# Altium PCB Copy of PCB1.PcbDoc
Units mil, origin at the board's own origin, x right, y up, seen from the top; angles counter-clockwise.
Board outline 6000 x 4000 mil, 2 copper layers (Top Layer, Bottom Layer); 109 components, 164 nets, 445 pads, 187 vias.
Unrouted connection lines stored in the file: 77.
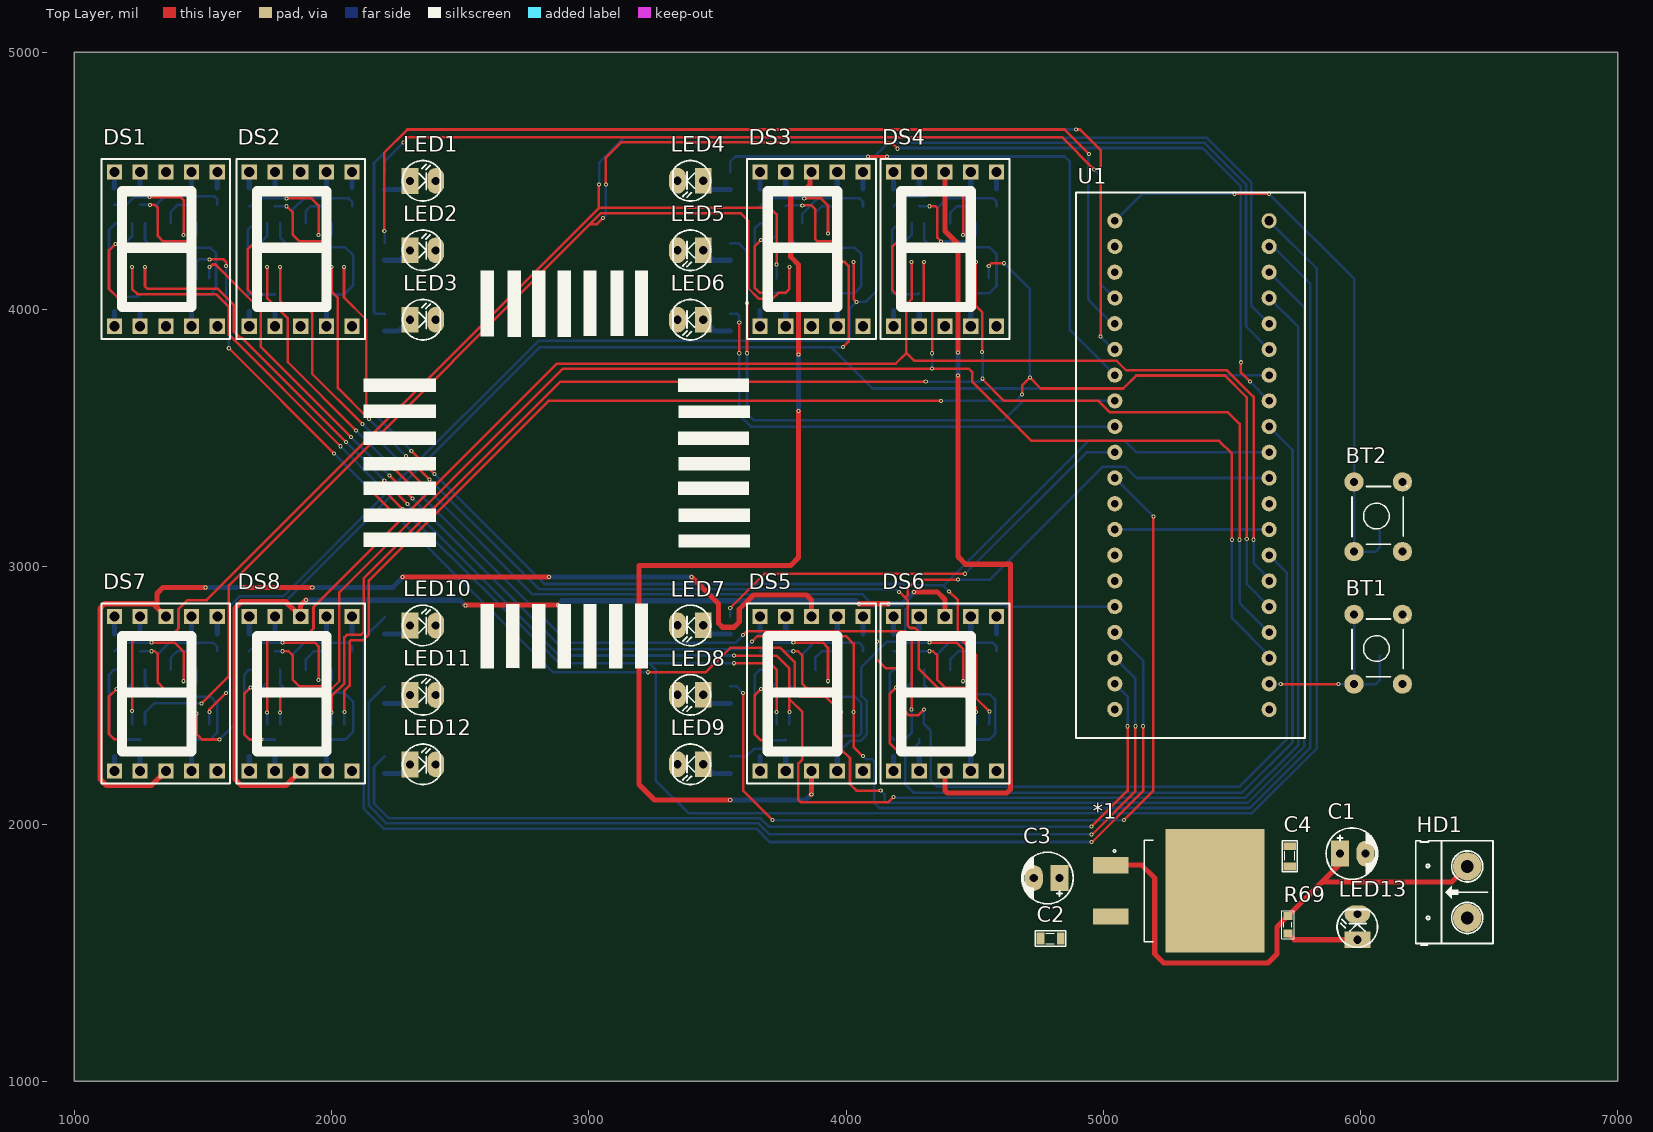
[diagram p0: Top Layer view]
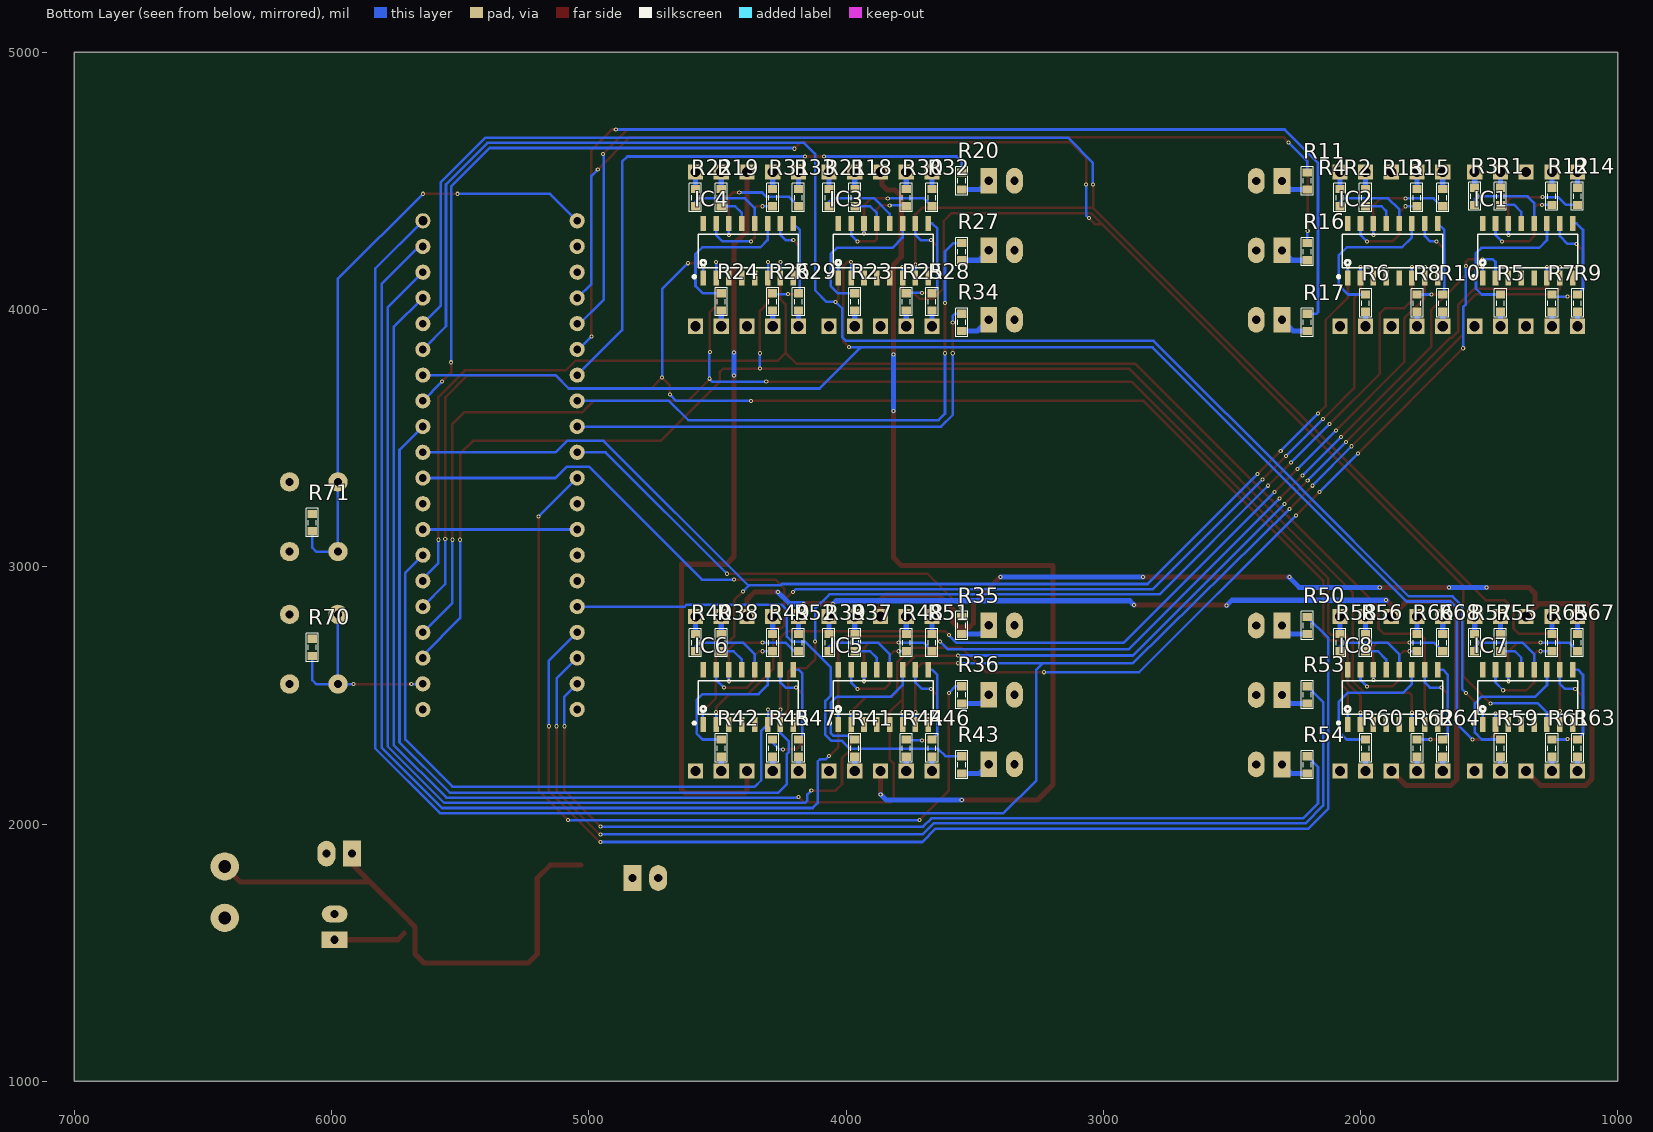
[diagram p1: Bottom Layer view, seen from below]

## Layer stack, top to bottom
Top Solder: solder mask 0.4, Solder Resist, Dk 3.5
Top Layer: signal copper 1.4
Dielectric 1: dielectric 12.6, FR-4, Dk 4.8
Bottom Layer: signal copper 1.4
Bottom Solder: solder mask 0.4, Solder Resist, Dk 3.5

## Board outline
1000,1000 7000,1000 7000,5000 1000,5000

## Design rules (kind name [scope] priority, off if disabled: settings)
Clearance [All] p1: gap=10 ignorepadtopadclearanceinfootprint=TRUE
PlaneClearance [All] p1: clearance=12
PlaneConnect [All] p1: planeconnectstyle=Relief reliefexpansion=20 reliefentries=4 reliefconductorwidth=15 reliefairgap=8
PolygonConnect [All] p1: connectstyle=Relief reliefconductorwidth=15 reliefentries=4 polygonreliefangle="45 Angle" airgapwidth=8
RoutingVias [All] p1: holewidth=7.87 width=15.75 viastyle="Through Hole" minholewidth=7.87 minwidth=15.75 maxholewidth=7.87 maxwidth=15.75
SolderMaskExpansion [All] p1: expansion=4
Width [All] p1: maxlimit=40 minlimit=8 preferedwidth=10
28 further rules are at their usual default settings.

## Classes and differential pairs
component class Sheet1: *1 BT1 BT2 C1 C2 C3 C4 DS1 DS2 DS3 DS4 DS5 DS6 DS7 DS8 HD1 IC1 LED1 LED2 LED3 LED4 LED5 LED6 LED7 LED8 LED9 LED10 LED11 LED12 LED13 R1 R2 R3 R4 R5 R6 R7 R8 R9 R10 R11 R12 R13 R14 R15 R16 R17 R18 R19 R20 R21 R22 R23 R24 R25 R26 R27 R28 R29 R30 R31 R32 R33 R34 R35 R36 R37 R38 R39 R40 R41 R42 R43 R44 R45 R46 R47 R48 R49 R50 R51 R52 R53 R54 R55 R56 R57 R58 R59 R60 R61 R62 R63 R64 R65 R66 R67 R68 R69 R70 R71 U1

## Components (designator, comment, footprint, x,y, rotation, side; value= is the part's Value field where it differs from the comment)
*1 "7805to263" 7805 5293.78,1740 r0 top
BT1 "BTv" SW4 5967,2557 r90 top
BT2 "BTDX" SW4 5967,3072 r90 top
C1 "CAP hoa" CP1/2 5920,1885 r0 top
C2 "104" SM-CAP-0805 4750,1555 r0 top value=0,1uF/300V
C3 "CAP hoa" CP1/2 4830,1790 r180 top
C4 "104" SM-CAP-0805 5725,1920 r270 top value=0,1uF/300V
DS1 "7SEG-A" LED7SEG 1355,4235 r0 top locked
DS2 "7SEG-A" LED7SEG 1879,4235 r0 top locked
DS3 "7SEG-A" LED7SEG 3865,4235 r0 top locked
DS4 "7SEG-A" LED7SEG 4384,4235 r0 top locked
DS5 "7SEG-A" LED7SEG 3865,2506.54 r0 top locked
DS6 "7SEG-A" LED7SEG 4384,2506.54 r0 top locked
DS7 "7SEG-A" LED7SEG 1355,2506.54 r0 top locked
DS8 "7SEG-A" LED7SEG 1879,2506.54 r0 top locked
HD1 "Header 2" HED2 6415,1635 r90 top
IC1 "7447" ic74ls47 975,4122.4 r180 bottom locked value="7447 , 74247"
IC2 "7447" ic74ls47 1500,4122.4 r180 bottom locked value="7447 , 74247"
IC3 "7447" ic74ls47 3480,4122.4 r180 bottom locked value="7447 , 74247"
IC4 "7447" ic74ls47 4005,4122.4 r180 bottom locked value="7447 , 74247"
IC5 "7447" ic74ls47 3480,2387.4 r180 bottom locked value="7447 , 74247"
IC6 "7447" ic74ls47 4005,2387.4 r180 bottom locked value="7447 , 74247"
IC7 "7447" ic74ls47 975,2387.4 r180 bottom locked value="7447 , 74247"
IC8 "7447" ic74ls47 1500,2387.4 r180 bottom locked value="7447 , 74247"
LED1 "LED" LED-3 2305,4500 r0 top value="LED 3 ly Single Colour"
LED2 "LED" LED-3 2305,4230 r0 top value="LED 3 ly Single Colour"
LED3 "LED" LED-3 2305,3960 r0 top value="LED 3 ly Single Colour"
LED4 "LED" LED-3 3445,4500.7 r180 top value="LED 3 ly Single Colour"
LED5 "LED" LED-3 3445,4230.7 r180 top value="LED 3 ly Single Colour"
LED6 "LED" LED-3 3445,3960.7 r180 top value="LED 3 ly Single Colour"
LED7 "LED" LED-3 3445,2772.23 r180 top value="LED 3 ly Single Colour"
LED8 "LED" LED-3 3445,2502.23 r180 top value="LED 3 ly Single Colour"
LED9 "LED" LED-3 3445,2232.23 r180 top value="LED 3 ly Single Colour"
LED10 "LED" LED-3 2305,2771.54 r0 top value="LED 3 ly Single Colour"
LED11 "LED" LED-3 2305,2501.54 r0 top value="LED 3 ly Single Colour"
LED12 "LED" LED-3 2305,2231.54 r0 top value="LED 3 ly Single Colour"
LED13 "LED" LED-3 5988.19,1550 r90 top value="LED 3 ly Single Colour"
R1 "10k" "Resistor SMD0603" 1456,4440 r270 bottom
R2 "10k" "Resistor SMD0603" 1980,4435 r270 bottom
R3 "10k" "Resistor SMD0603" 1556,4440 r270 bottom
R4 "10k" "Resistor SMD0603" 2080,4435 r270 bottom
R5 "10k" "Resistor SMD0603" 1456,4025 r90 bottom
R6 "10k" "Resistor SMD0603" 1980,4025 r90 bottom
R7 "10k" "Resistor SMD0603" 1256,4025 r90 bottom
R8 "10k" "Resistor SMD0603" 1780,4025 r90 bottom
R9 "10k" "Resistor SMD0603" 1156,4025 r90 bottom
R10 "10k" "Resistor SMD0603" 1680,4025 r90 bottom
R11 "10k" "Resistor SMD0603" 2207,4500 r90 bottom
R12 "10k" "Resistor SMD0603" 1256,4440 r270 bottom
R13 "10k" "Resistor SMD0603" 1780,4435 r270 bottom
R14 "10k" "Resistor SMD0603" 1156,4440 r270 bottom
R15 "10k" "Resistor SMD0603" 1680,4435 r270 bottom
R16 "10k" "Resistor SMD0603" 2207,4225 r90 bottom
R17 "10k" "Resistor SMD0603" 2207,3950 r90 bottom
R18 "10k" "Resistor SMD0603" 3965,4435 r270 bottom
R19 "10k" "Resistor SMD0603" 4485,4435 r270 bottom
R20 "10k" "Resistor SMD0603" 3550,4500 r90 bottom
R21 "10k" "Resistor SMD0603" 4066,4435 r270 bottom
R22 "10k" "Resistor SMD0603" 4585,4435 r270 bottom
R23 "10k" "Resistor SMD0603" 3966,4030 r90 bottom
R24 "10k" "Resistor SMD0603" 4485,4030 r90 bottom
R25 "10k" "Resistor SMD0603" 3766,4030 r90 bottom
R26 "10k" "Resistor SMD0603" 4285,4030 r90 bottom
R27 "10k" "Resistor SMD0603" 3550,4225 r90 bottom
R28 "10k" "Resistor SMD0603" 3666,4030 r90 bottom
R29 "10k" "Resistor SMD0603" 4185,4030 r90 bottom
R30 "10k" "Resistor SMD0603" 3766,4435 r270 bottom
R31 "10k" "Resistor SMD0603" 4285,4435 r270 bottom
R32 "10k" "Resistor SMD0603" 3666,4435 r270 bottom
R33 "10k" "Resistor SMD0603" 4185,4435 r270 bottom
R34 "10k" "Resistor SMD0603" 3550,3950 r90 bottom
R35 "10k" "Resistor SMD0603" 3550,2771.54 r90 bottom
R36 "10k" "Resistor SMD0603" 3550,2502.23 r90 bottom
R37 "10k" "Resistor SMD0603" 3965,2705 r270 bottom
R38 "10k" "Resistor SMD0603" 4485,2705 r270 bottom
R39 "10k" "Resistor SMD0603" 4066,2705 r270 bottom
R40 "10k" "Resistor SMD0603" 4585,2705 r270 bottom
R41 "10k" "Resistor SMD0603" 3966,2295 r90 bottom
R42 "10k" "Resistor SMD0603" 4485,2295 r90 bottom
R43 "10k" "Resistor SMD0603" 3550,2230 r90 bottom
R44 "10k" "Resistor SMD0603" 3766,2295 r90 bottom
R45 "10k" "Resistor SMD0603" 4285,2295 r90 bottom
R46 "10k" "Resistor SMD0603" 3666,2295 r90 bottom
R47 "10k" "Resistor SMD0603" 4185,2295 r90 bottom
R48 "10k" "Resistor SMD0603" 3765,2705 r270 bottom
R49 "10k" "Resistor SMD0603" 4285,2705 r270 bottom
R50 "10k" "Resistor SMD0603" 2207,2771.54 r90 bottom
R51 "10k" "Resistor SMD0603" 3666,2705 r270 bottom
R52 "10k" "Resistor SMD0603" 4185,2705 r270 bottom
R53 "10k" "Resistor SMD0603" 2207,2502.23 r90 bottom
R54 "10k" "Resistor SMD0603" 2207,2230 r90 bottom
R55 "10k" "Resistor SMD0603" 1456,2705 r270 bottom
R56 "10k" "Resistor SMD0603" 1980,2705 r270 bottom
R57 "10k" "Resistor SMD0603" 1556,2705 r270 bottom
R58 "10k" "Resistor SMD0603" 2080,2705 r270 bottom
R59 "10k" "Resistor SMD0603" 1456,2295 r90 bottom
R60 "10k" "Resistor SMD0603" 1980,2295 r90 bottom
R61 "10k" "Resistor SMD0603" 1256,2295 r90 bottom
R62 "10k" "Resistor SMD0603" 1780,2295 r90 bottom
R63 "10k" "Resistor SMD0603" 1156,2295 r90 bottom
R64 "10k" "Resistor SMD0603" 1680,2295 r90 bottom
R65 "10k" "Resistor SMD0603" 1256,2705 r270 bottom
R66 "10k" "Resistor SMD0603" 1780,2705 r270 bottom
R67 "10k" "Resistor SMD0603" 1156,2705 r270 bottom
R68 "10k" "Resistor SMD0603" 1680,2705 r270 bottom
R69 "10k" "Resistor SMD0603" 5717.67,1608.54 r90 top
R70 "10k" "Resistor SMD0603" 6075,2686.54 r90 bottom
R71 "10k" "Resistor SMD0603" 6075,3171.54 r90 bottom
U1 "STM32F103CT8" STM32F103CT6 5045,4345 r0 top locked

## Footprints (in the part's own frame and the unit in brackets; to place one, negate y for a bottom-side part, rotate by r counter-clockwise, add the part's x,y. Pads: shape width x height; smd on the part's side, far side on the other; paste and mask are expansions set on the pad)
7805 [mm]
  rect 3.5x1.6 smd: 1(-6.7,2.54) 3(-6.7,-2.54)
  rect 9.75x12.2 smd paste-7: 2(3.575,0)
  silkscreen extent -6.48,-5 -2.51,5, body extent -7,-4.91 7.58,4.91, height 4.22
CP1/2 [mil]
  rect 70x100 hole 32: 1(0,0)
  oval 70x100 hole 32: 2(100,0)
  silkscreen extent -53,-100 147,100, body extent -54,-99 144,100, height 296
HED2 [mil] "Header 2, 2 pin, hight 300mil, Pin to Pin 200, Colour Green"
  round 110 hole 50: 1(0,0) 2(200,0)
  silkscreen extent -106,-100 300,200, body extent -92,-90 302,205, height 394
ic74ls47 [mm]
  rect 0.55x1.5 smd: 1(-13.97,0) 2(-12.7,0) 3(-11.43,0) 4(-10.16,0) 5(-8.89,0) 6(-7.62,0) 7(-6.35,0) 8(-5.08,0) 9(-5.08,5.4) 10(-6.35,5.4) 11(-7.62,5.4) 12(-8.89,5.4) 13(-10.16,5.4) 14(-11.43,5.4) 15(-12.7,5.4) 16(-13.97,5.4)
  silkscreen extent -14.99,0 -4.57,4.32, body extent -14.48,-0.36 -4.57,5.84, height 1.7
LED7SEG [mm] "LED7SEG"
  round 1.524 on Top Overlay: 0(4.724,-5.334)
  rect 1.5x1.5 hole 1: 1(-5.055,-7.62) 2(-2.515,-7.62) 3(0.025,-7.62) 4(2.565,-7.62) 5(5.105,-7.62) 6(5.105,7.62) 7(2.565,7.62) 8(0.025,7.62) 9(-2.515,7.62) 10(-5.055,7.62)
  silkscreen extent -6.32,-8.89 6.38,8.89, body extent -6.35,-9.52 6.35,9.53, height 8.03
LED-3 [mil] "LED 2 PIN, 3ly Only colour"
  rect 65x100 hole 32: 1(0,0)
  oval 65x100 hole 32: 2(100,0)
  silkscreen extent -29,-78 118,79, body extent -29,-75 109,75, height 256
"Resistor SMD0603" [mm]
  rect 0.8x0.9 smd: 1(-0.85,0) 2(0.85,0)
  silkscreen extent -1.4,-0.61 1.4,0.58, body extent -0.77,-0.45 0.78,0.4, height 0.49
SM-CAP-0805 [mil]
  rect 30x47.24 smd: 1(6,0) 2(85,0)
  silkscreen extent -15,-30 105,30, body extent 6,-25 84,25, height 31
STM32F103CT6 [mm] "STM32F103CT6"
  round 1.5 hole 0.762: 1(0,0) 2(0,-2.54) 3(0,-5.08) 4(0,-7.62) 5(0,-10.16) 6(0,-12.7) 7(0,-15.24) 8(0,-17.78) 9(0,-20.32) 10(0,-22.86) 11(0,-25.4) 12(0,-27.94) 13(0,-30.48) 14(0,-33.02) 15(0,-35.56) 16(0,-38.1) 17(0,-40.64) 18(0,-43.18) 19(0,-45.72) 20(0,-48.26) 22(15.24,-2.54) 23(15.24,-5.08) 24(15.24,-7.62) 25(15.24,-10.16) 26(15.24,-12.7) 27(15.24,-15.24) 28(15.24,-17.78) 29(15.24,-20.32) 30(15.24,-22.86) 31(15.24,-25.4) 32(15.24,-27.94) 33(15.24,-30.48) 34(15.24,-33.02) 35(15.24,-35.56) 36(15.24,-38.1) 37(15.24,-40.64) 38(15.24,-43.18) 39(15.24,-45.72) 40(15.24,-48.26)
  round 1.5 hole 0.9: 21(15.24,0)
  silkscreen extent -3.81,-51.05 18.8,2.79, body extent -3.61,-55.78 18.89,2.86, height 11.01
SW4 [mil] "SW button 4pin, 250 x250 mil"
  round 75 hole 31: 1(-13,-8) 1(258,-8) 2(-13,-196) 2(258,-196)
  silkscreen extent 15,-215 240,0, body extent -31,-225 281,19, height 276

## Part data
BT1 BT2: library part BUTTON
C1 C3: "Cap"
C2 C4: library part "CAP SMD", Designed by=VanDungEvn
DS1 DS2 DS3 DS4 DS5 DS6 DS7 DS8: library part "LED 7SEG-A", "14.2 mm General Purpose Blue 7-Segment Display: CA, RH DP, Gray Surface", Colour=Blue, PackageDocument=24-Sep-2002, ComponentLink1Description="Manufacturer Link", ComponentLink1URL=http://www.agilent.com/, DatasheetDocument=24-Sep-2002, LatestRevisionDate=17-Dec-2003, LatestRevisionNote="Schematic revised, PCB Footprint replaced.", MinimumIntensity="2020 ucd", Note="IF = 10 mA", PackageReference=H, Published=8-Jun-2000, Publisher="Altium Limited"
HD1: "Header 2 (Green)"
IC1 IC2 IC3 IC4 IC5 IC6 IC7 IC8: "BCD to 7-Segment Decoder/Driver"
LED1 LED2 LED3 LED4 LED5 LED6 LED7 LED8 LED9 LED10 LED11 LED12 LED13: "LED Single colour Green and Red"
R1 R2 R3 R4 R5 R6 R7 R8 R9 R10 R11 R12 R13 R14 R15 R16 R17 R18 R19 R20 R21 R22 R23 R24 R25 R26 R27 R28 R29 R30 R31 R32 R33 R34 R35 R36 R37 R38 R39 R40 R41 R42 R43 R44 R45 R46 R47 R48 R49 R50 R51 R52 R53 R54 R55 R56 R57 R58 R59 R60 R61 R62 R63 R64 R65 R66 R67 R68 R69 R70 R71: library part "Res SMD", "Res"

## Via types
v1: diameter 15.75, hole 7.87, Top Layer to Bottom Layer, 187 vias

## Nets (pads, with @x,y where several pads share a name; then routed paths per layer and width w, separated by ;. In a path a pad name is that pad's centre, name@x,y a point inside that pad or via, vN(x,y) a via of type N, cw(c..) or ccw(c..) an arc to the next point about the centre after c; other vN are vias at no path point)
5v: *1.3 C3.1 C4.2 R70.2 R71.2 U1.12 U1.15
A0: R11.2 U1.4 | length 3425
  Top Layer w10: v1(2280,4650) 2300,4670 4184.35,4670 4840,4670 v1(4965,4545)
  Bottom Layer w10: R11.2 2207,4577 v1(2280,4650) ; v1(4965,4545) 4990,4520 4990,4100 U1.4
A1: R16.2 U1.5 | length 3878.7
  Top Layer w10: v1(2205,4305) 2205,4610 2295,4700 4850,4700 v1(4945,4605)
  Bottom Layer w10: v1(2205,4305) 2207,4303 R16.2 ; v1(4945,4605) 4942.13,4602.13 4942.13,4037.87 5035,3945 U1.5
A2: R17.2 U1.6 | length 4337.4
  Top Layer w10: v1(4895,4700) 4910,4700 4990,4620 v1(4990,3895)
  Bottom Layer w10: R17.2 2171.54,3983.46 2165,3990 2165,4570 2295,4700 v1(4895,4700) ; v1(4990,3895) 5040,3845 U1.6
A3: R20.2 U1.7 | length 2280.6
  Top Layer w10: v1(4085,4595) v1(4160,4595)
  Bottom Layer w10: R20.2 3550,4575 3570,4595 v1(4085,4595) ; v1(4160,4595) 4850,4595 4870,4575 4870,3920 U1.7
A4: R27.2 U1.8 | length 2180.3
  Top Layer w10: v1(3615,3830) v1(3615,4025)
  Bottom Layer w10: R27.2 3581.54,4258.46 3615,4225 v1(3615,4025) ; v1(3615,3830) 3615,3595 3640,3570 4613.28,3570 4688.28,3645 U1.8
A5: R34.2 U1.9 | length 1901.7
  Top Layer w10: v1(3585,3830) v1(3585,3950)
  Bottom Layer w10: R34.2 3576.54,3983.46 3585,3975 v1(3585,3950) ; v1(3585,3830) 3585,3590.8 3630.8,3545 U1.9
A6: R35.2 U1.10 | length 1780.6
  Top Layer w10: v1(3550,2840) 3682.87,2972.87 v1(4462.87,2972.87)
  Bottom Layer w10: R35.2 v1(3550,2840) ; v1(4462.87,2972.87) 4935,3445 U1.10
A7: R36.2 U1.11 | length 3408
  Top Layer w10: v1(3600,2510) 3600,2130 v1(3715,2015) ; v1(5080,2015) 5195,2130 v1(5195,3195)
  Bottom Layer w10: R36.2 3574.3,2535.7 v1(3600,2510) ; v1(3715,2015) v1(5080,2015) ; U1.11 v1(5195,3195)
A8: IC2.2 IC6.2 U1.31 | length 5384.5
  Top Layer w10: v1(2000,4165) 2000,4070 2025,4045 2025,3695 2135,3585 v1(2145,3575) ; v1(2290,3430) v1(2380,3340) ; v1(4206.06,2901.06) 4208.94,2901.06 4230,2880 ; v1(4435,2950) 4274.64,2950 4240,2915.36 4240,2890 4230,2880 ; v1(4505,2435) 4505,2453.65 4453.65,2505 4381.72,2505 4283.36,2603.36 4283.36,2746.64 4267.99,2762.01 4249.26,2762.01 4240,2771.27 4240,2870 4230,2880
  Bottom Layer w10: IC2.2 v1(2000,4165) ; v1(2145,3575) v1(2290,3430) ; v1(2380,3340) 2807.13,2912.87 4194.25,2912.87 v1(4206.06,2901.06) ; v1(4435,2950) 4560,2950 4999.53,3389.53 5085.47,3389.53 5130,3345 U1.31 ; IC6.2 v1(4505,2435)
A9: IC4.7 IC8.7 U1.35 | length 5918.9
  Top Layer w10: v1(1750,2433.77) 1750,2720 1770,2740 1910,2740 1930,2760 1930,2842.88 2877.12,3790 4193.46,3790 4235,3831.54 ; v1(4255,4185) 4255,4040 4235,4020 4235,3831.54 ; v1(5585,3105) 5585,3660 5481.56,3763.44 5089.53,3763.44 5052.5,3800.47 4266.06,3800.47 4235,3831.54
  Bottom Layer w10: IC8.7 v1(1750,2433.77) ; IC4.7 v1(4255,4185) ; v1(5585,3105) 5585,3015 5645,2955 U1.35 U1.35@5650,2940
A10: IC2.6 IC6.6 U1.34 | length 6192.9
  Top Layer w10: v1(1800,4165) 1800,4035 1830,4005 1904.53,4005 1925,3984.53 1925,3750 v1(2120,3555) ; v1(2270,3405) v1(2360,3315) ; v1(4120,2710) 4120,2640 4155,2605 4210,2605 4225,2590 4225,2442.65 4245.53,2422.13 4280,2422.13 v1(4302.87,2445)
  Bottom Layer w10: IC2.6 v1(1800,4165) ; v1(2120,3555) v1(2270,3405) ; v1(2360,3315) 2782.13,2892.87 4064.25,2892.87 4120,2837.13 v1(4120,2710) ; v1(4302.87,2445) 4302.87,2389.53 IC6.6 4329.17,2363.23 4329.17,2242.63 4329.53,2242.28 4329.53,2170.09 4354.61,2145 5530,2145 5578.51,2193.51 5664.1,2279.1 5712.61,2327.61 5712.87,2327.87 5712.87,2977.13 U1.34
A11: IC2.1 IC6.1 U1.30 | length 5281.4
  Top Layer w10: v1(2048.46,4165) 2048.46,4046.8 2135,3960.27 2135,3625 v1(2165,3595) ; v1(2310,3450) v1(2400,3360) ; v1(4400.53,2904.47) 4435,2870 4435,2728.28 4506.35,2656.94 4506.35,2488.65 v1(4557.35,2437.65)
  Bottom Layer w10: v1(2048.46,4165) 2050,4163.46 IC2.1 ; v1(2165,3595) v1(2310,3450) ; v1(2400,3360) 2827.13,2932.87 4249.31,2932.87 4254.64,2927.54 4275.36,2927.54 4275.54,2927.35 4380,2927.35 4942.18,3489.53 5083.94,3489.53 5128.46,3445 U1.30 ; 4380,2925 v1(4400.53,2904.47) ; IC6.1 4557.35,2389.75 v1(4557.35,2437.65)
A12: IC2.7 IC6.7 U1.29 | length 6803.9
  Top Layer w10: v1(1750,4165) 1750,4045.27 1830,3965.27 1830,3795 v1(2095,3530) ; v1(2245,3380) v1(2335,3290) ; v1(3600,2735) 3615,2750 4230,2750 4255,2725 v1(4255,2445)
  Bottom Layer w10: IC2.7 v1(1750,4165) ; v1(2095,3530) v1(2245,3380) ; v1(2335,3290) 2920,2705 3571.61,2705 v1@3600.8,2734.2 ; v1(4255,2445) IC6.7 4255,2353.14 4222.13,2320.27 4222.13,2280.53 4230,2272.65 4230,2155 4262.87,2122.13 5540.39,2122.13 5735.71,2317.44 5735.71,2323.63 5735.71,3454.29 U1.29
A15: IC3.6 IC7.6 U1.28 | length 7743.7
  Top Layer w10: v1(1495,2469) 1600.53,2574.53 1600.53,2927.24 2472.13,3798.84 2472.13,3799.47 3005,4332.35 ; v1(3055,4355) 3032.35,4332.35 3005,4332.35 ; v1(3066.44,4486.44) 3066.44,4591.44 3125,4650 4176.06,4650 4200,4626.06 v1(4200,4625) ; v1(3780,4165) 3780,4080 3765,4065 3737.35,4065 3714.47,4042.13 3660.59,4042.13 3620,4082.72 3620,4345 3590,4375 3047.65,4375 3005,4332.35 ; v1(5535,3795) 5535,3755 v1(5570,3720)
  Bottom Layer w10: IC7.6 1275,2433.77 1310.23,2469 v1(1495,2469) ; v1(3055,4355) 3066.44,4366.44 v1(3066.44,4486.44) ; IC3.6 v1(3780,4165) ; v1(4200,4625) 4202.87,4627.87 5385.56,4627.87 5535,4478.43 v1(5535,3795) ; v1(5570,3720) U1.28
B0: R43.2 U1.16 | length 1985.3
  Bottom Layer w10: R43.2 3613.25,2263.46 3642.07,2292.28 3984.5,2292.28 4015.09,2322.87 4056.69,2322.87 4080,2346.18 4080,2478.28 4060,2498.28 4060,2610 4157.72,2707.72 4208.93,2707.72 4229.53,2728.31 4229.53,2831.33 4250.7,2852.5 4619.3,2852.5 4626.8,2845 U1.16
B1: R50.2 U1.17 | length 4607.6
  Top Layer w10: v1(4955,1930) 4957.35,1930 5155,2127.65 v1(5155,2380)
  Bottom Layer w10: R50.2 2125,2723 2125,2060 2202.87,1982.13 3651.31,1982.13 3703.43,1930 3753.43,1930 v1(4955,1930) ; U1.17 5155,2635 v1(5155,2380)
B3: IC3.2 IC7.2 U1.27 | length 5752.4
  Top Layer w10: v1(1475,2430) 1475,2350 1496.54,2328.46 v1(1565,2328.46) ; v1(3980,4185) 3995,4185 4010.53,4169.47 4010.53,3875.53 v1(3988.94,3853.94)
  Bottom Layer w10: IC7.2 v1(1475,2430) ; v1(1565,2328.46) 1625,2388.46 1625,2840 1650,2865 1820.63,2865 2257.87,3302.24 2257.87,3302.87 2807.87,3852.87 3987.87,3852.87 v1(3988.94,3853.94) ; 3945.53,3850 4102.65,3692.87 5077.87,3692.87 5130,3745 U1.27 ; IC3.2 v1(3980,4185)
B4: IC3.1 IC7.1 U1.26 | length 6533.1
  Top Layer w10: v1(1525,2435) 1525,2445 v1(1590,2510) ; v1(4030,4185) 4030.53,4184.47 4030.53,4039.47 v1(4040,4030)
  Bottom Layer w10: IC7.1 v1(1525,2435) ; v1(1590,2510) 1605,2525 1605,2848.28 1641.72,2885 1812.35,2885 2237.87,3310.53 2237.87,3311.16 2804.59,3877.87 3999.47,3877.87 4015,3893.4 4015,4005 v1(4040,4030) 4075,4030 4120,4075 4120,4605 4162.87,4647.87 5393.84,4647.87 5555,4486.72 5555,3935 U1.26 ; IC3.1 v1(4030,4185)
B5: IC3.7 IC7.7 U1.25 | length 7226.4
  Top Layer w10: v1(1225,2440) 1225,2705 1260,2740 1385,2740 1405,2760 1405,2835.8 1439.2,2870 1514.37,2870 3039.37,4395 ; v1(3040,4486.27) 3039.37,4485.63 3039.37,4395 ; v1(3730,4175) 3730,4370 3705,4395 3039.37,4395
  Bottom Layer w10: IC7.7 v1(1225,2440) ; v1(3040,4486.27) 3040,4570 3137.87,4667.87 5402.13,4667.87 5575,4495 5575,4015 U1.25 ; IC3.7 v1(3730,4175)
B6: IC1.6 IC5.6 U1.24 | length 7763.5
  Top Layer w10: v1(1275,4165) 1275,4090 1285,4080 1558.28,4080 1620.53,4017.76 1620.53,3914.2 1644.26,3890.47 1650.66,3890.47 v1(2055.56,3485.56) ; v1@2207.66,3335 v1(2205,3335) v1(2295.85,3244.15) ; v1(3565,2655) 3566.17,2653.83 3731.17,2653.83 3780,2605 3780,2490 ; v1(3780,2435) 3780,2485 3830,2435 3830,2250.8 3815,2235.8 3815,2093.46 3823.46,2085 4165,2085 v1(4185,2105)
  Bottom Layer w10: IC1.6 v1(1275,4165) ; v1(2055.56,3485.56) 2206.13,3335 v1(2205,3335) ; v1@2298.51,3244.15 v1(2295.85,3244.15) 2885,2655 v1(3565,2655) ; IC5.6 v1(3780,2435) ; v1(4185,2105) 4187.87,2102.13 5553.47,2102.13 5758.81,2307.46 5758.81,2333.2 5758.81,3931.19 U1.24
B7: IC1.2 IC5.2 U1.23 | length 7781.9
  Top Layer w10: v1(1525,4195) 1580,4195 1590,4185 v1(1590,4170) ; v1(1600.53,3849.47) v1(2010,3440) ; v1(2160,3290) v1(2250,3200) ; v1(3230,2590) 3455,2590 3550,2685 3745,2685 3800,2630 3800,2515 3820,2495 3921.17,2495 v1(3981.17,2435) 3981.17,2290.42 4015.53,2256.06 4015.53,2154.47 4040,2130 v1(4135,2130)
  Bottom Layer w10: IC1.2 1475,4185 1485,4195 v1(1525,4195) ; v1(1590,4170) 1590,4020 1600.53,4009.47 v1(1600.53,3849.47) ; v1(2010,3440) v1(2160,3290) ; v1(2250,3200) 2860,2590 v1(3230,2590) ; IC5.2 3981.17,2388.58 v1(3981.17,2435) ; v1(4135,2130) 4150,2115 4150,2091.6 4159.47,2082.13 5561.76,2082.13 5781.9,2302.27 5781.9,2342.77 5781.9,4008.1 U1.23
B8: IC1.1 IC5.1 U1.22 | length 7822.8
  Top Layer w10: v1(1525,4165) 1527.35,4165 1537.35,4175 1548.64,4175 1724.53,3999.12 1724.53,3855.47 v1(2075,3505) ; v1(2225,3355) v1(2315,3265) ; v1(3635,2710) 3655,2730 4000,2730 4030,2700 v1(4030,2435) 4030,2300 v1@4065,2265
  Bottom Layer w10: IC1.1 v1(1525,4165) ; v1(2075,3505) v1(2225,3355) ; v1(2315,3265) 2900,2680 3605,2680 v1(3635,2710) ; IC5.1 v1(4030,2435) ; v1(4066,2265) 4066.06,2265 4080,2251.06 4101.74,2251.06 4110.53,2242.28 4110.53,2081.6 4130,2062.13 5570.04,2062.13 5805,2297.08 5805,2352.34 5805,4100 5660,4245 U1.22
B9: IC1.7 IC5.7 U1.21 | length 8839.7
  Top Layer w10: v1(1225,4165) 1225,4080 1245,4060 1550,4060 1600.53,4009.47 1600.53,3902.12 2034.19,3468.46 v1(2035,3468.46) ; v1(2186.73,3315) v1(2276.73,3225) ; v1(3565,2625) 3705,2625 3730,2600 v1(3730,2435)
  Bottom Layer w10: IC1.7 v1(1225,4165) ; v1(2035,3468.46) 2183.46,3320 v1(2186.73,3315) ; v1(2276.73,3225) 2880,2630 2885,2625 3235,2625 ; v1(3565,2625) 3235,2625 ; IC5.7 v1(3730,2435) ; U1.21 5830,4160 5830,2390 5830,2293.8 5578.33,2042.13 3387.87,2042.13 3260,2170 3260,2600 3235,2625
B10: R53.2 U1.18 | length 4135.9
  Top Layer w10: v1(4955,1960) 4957.35,1960 5125,2127.65 v1(5125,2380)
  Bottom Layer w10: R53.2 2145,2473.7 2145,2071.72 2214.59,2002.13 3659.59,2002.13 3701.72,1960 v1(4955,1960) ; U1.18 5125,2565 v1(5125,2380)
B11: R54.2 U1.19 | length 3661.8
  Top Layer w10: v1(4955,1990) 5095,2130 v1(5095,2380)
  Bottom Layer w10: R54.2 2165,2221.47 2165,2080 2222.87,2022.13 3667.87,2022.13 3700,1990 v1(4955,1990) ; U1.19 5095,2495 v1(5095,2380)
B12: BT1.1 R70.1 U1.39 | length 801.7
  Top Layer w10: v1(5690,2544) v1(5915,2544)
  Bottom Layer w10: U1.39 5646,2544 v1(5690,2544) ; v1(5915,2544) BT1.1@5975,2544 ; BT1.1@5975,2815 BT1.1@5975,2544 ; R70.1 6075,2559 6060,2544 BT1.1@5975,2544
B13: IC4.6 IC8.6 U1.38 | length 6045
  Top Layer w10: v1(1800,2433.77) 1800,2500 1810,2510 1985,2510 2030,2555 2030,2900 2900,3770 v1(4335,3770) 4477.13,3770 4490,3757.13 4490,3720 4720.47,3489.53 5450.47,3489.53 5500,3440 v1(5500,3105) ; v1(4302.87,4184.47) 4302.87,4027.13 4335,3995 v1(4335,3830)
  Bottom Layer w10: IC8.6 v1(1800,2433.77) ; v1(4302.87,4184.47) 4302.87,4124.53 IC4.6 ; v1(4335,3770) v1(4335,3830) ; v1(5500,3105) 5500,2800 5645,2655 U1.38
B14: IC4.2 IC8.2 U1.37 | length 5837.3
  Top Layer w10: v1(2000,2433.77) 2000,2496.72 2050,2546.72 2050,2725 2060,2735 2115,2735 2125,2745 2125,2955 2890,3720 v1(4310,3720) ; v1(4505,4184.47) 4505,4014.53 4529.53,3990 v1(4529.53,3835) ; v1(4530.99,3731) 4530.99,3729.01 4615,3645 4982.03,3645 5026.56,3600.47 5484.53,3600.47 5530,3555 v1(5530,3105)
  Bottom Layer w10: IC8.2 v1(2000,2433.77) ; v1(4310,3720) 4311.56,3718.44 4518.44,3718.44 v1(4530.99,3731) 4530.99,3833.54 v1(4529.53,3835) ; IC4.2 v1(4505,4184.47) ; v1(5530,3105) 5530,2860 U1.37
B15: IC4.1 IC8.1 U1.36 | length 5908.4
  Top Layer w10: v1(2050,2435) 2050,2518.43 2070,2538.43 2070,2710 2075,2715 2123.28,2715 2145,2736.72 2145,2946.72 2843.28,3645 v1(4370,3645) ; v1(4555,4169.47) 4555,4170 4565,4180 v1(4615,4180) ; v1(4685,3670) 4685,3705 v1(4715,3735) 4757.13,3692.87 5077.87,3692.87 5128.44,3743.44 5473.27,3743.44 5557.87,3658.84 v1(5557.87,3107.13)
  Bottom Layer w10: IC8.1 v1(2050,2435) ; v1(4370,3645) 4660,3645 v1(4685,3670) ; IC4.1 v1(4555,4169.47) ; v1(4615,4180) 4715,4080 v1(4715,3735) ; v1(5557.87,3107.13) 5557.87,2932.13 U1.36
C13: BT2.1 R71.1 U1.1 | length 2341.5
  Top Layer w10: v1(5510,4450) v1(5645,4450)
  Bottom Layer w10: U1.1 5150,4450 v1(5510,4450) ; v1(5645,4450) 5975,4120 5975,3330 5975,3059 6060,3059 6075,3074 R71.1
GND: *1.2 BT1.2 BT2.2 C1.2 C2.1 C3.2 C4.1 HD1.1 IC1.8 IC2.8 IC3.8 IC4.8 IC5.8 IC6.8 IC7.8 IC8.8 LED1.2 LED2.2 LED3.2 LED4.2 LED5.2 LED6.2 LED7.2 LED8.2 LED9.2 LED10.2 LED11.2 LED12.2 LED13.2 U1.14 U1.20 U1.32
Net*1_1: *1.1 C1.1 C2.2 HD1.2 R69.2 | length 2070.4
  Top Layer w20: *1.1 5150,1840 5200,1790 5200,1495 5235,1460 5640,1460 5675,1495 5675,1599.33 R69.2 5850.67,1775 ; C1.1 5920,1844.33 5850.67,1775 ; HD1.2 6355,1775 5850.67,1775
NetDS1_1: DS1.1 R9.1 | length 56.5
  Bottom Layer w20: DS1.1 R9.1
NetDS1_2: DS1.2 R7.1 | length 56.5
  Bottom Layer w20: DS1.2 R7.1
NetDS1_4: DS1.4 R5.1 | length 56.5
  Bottom Layer w20: DS1.4 R5.1
NetDS1_6: DS1.6 R3.1 | length 61.9
  Bottom Layer w20: R3.1@1555,4473.46 1556,4474.46 DS1.6
NetDS1_7: DS1.7 R1.1 | length 61.9
  Bottom Layer w20: R1.1@1455,4473.46 1456,4474.46 DS1.7
NetDS1_9: DS1.9 R12.1 | length 61.5
  Bottom Layer w20: R12.1 DS1.9
NetDS1_10: DS1.10 R14.1 | length 63.4
  Bottom Layer w10: DS1.10@1155,4534 DS1.10
  Bottom Layer w20: R14.1@1155,4473.46 1156,4474.46 DS1.10
NetDS2_1: DS2.1 R10.1 | length 56.5
  Bottom Layer w20: DS2.1 R10.1
NetDS2_2: DS2.2 R8.1 | length 56.5
  Bottom Layer w20: DS2.2 R8.1
NetDS2_4: DS2.4 R6.1 | length 56.5
  Bottom Layer w20: DS2.4 R6.1
NetDS2_6: DS2.6 R4.1 | length 61.5
  Bottom Layer w20: R4.1@2080,4473.46 DS2.6
NetDS2_7: DS2.7 R2.1 | length 61.5
  Bottom Layer w20: R2.1@1980,4473.46 DS2.7
NetDS2_9: DS2.9 R13.1 | length 61.5
  Bottom Layer w20: R13.1@1780,4473.46 DS2.9
NetDS2_10: DS2.10 R15.1 | length 61.5
  Bottom Layer w20: R15.1@1680,4473.46 DS2.10
NetDS3_1: DS3.1 R28.1 | length 61.5
  Bottom Layer w20: DS3.1 R28.1
NetDS3_2: DS3.2 R25.1 | length 61.5
  Bottom Layer w20: DS3.2 R25.1
NetDS3_4: DS3.4 R23.1 | length 61.5
  Bottom Layer w20: DS3.4 R23.1
NetDS3_6: DS3.6 R21.1 | length 66.5
  Bottom Layer w20: R21.1 DS3.6
NetDS3_7: DS3.7 R18.1 | length 66.9
  Bottom Layer w20: R18.1 3966,4469.46 DS3.7
NetDS3_8: DS3.8 DS5.3 | length 3844.4
  Top Layer w20: v1(3550,2093.46) 3255,2093.46 3195,2153.46 3195,3005 3785,3005 3815.53,3035.53 v1(3815.53,3605) ; v1(3815,3825) 3815,3896.13 3815.53,3896.66 3815.53,4174.47 3785,4205 3785,4440 3810,4465 3840,4465 3860,4485 3860,4529 DS3.8 ; v1(3865,2115) 3866,2116 DS5.3
  Bottom Layer w20: v1(3550,2093.46) 3843.46,2093.46 v1(3865,2115) ; v1(3815,3825) 3815,3605 v1(3815.53,3605)
NetDS3_9: DS3.9 R30.1 | length 66.5
  Bottom Layer w20: R30.1 DS3.9
NetDS3_10: DS3.10 R32.1 | length 66.5
  Bottom Layer w20: R32.1 DS3.10
NetDS4_1: DS4.1 R29.1 | length 61.5
  Bottom Layer w20: DS4.1 R29.1
NetDS4_2: DS4.2 R26.1 | length 61.5
  Bottom Layer w20: DS4.2 R26.1
NetDS4_4: DS4.4 R24.1 | length 61.5
  Bottom Layer w20: DS4.4 R24.1
NetDS4_6: DS4.6 R22.1 | length 66.5
  Bottom Layer w20: R22.1 DS4.6
NetDS4_7: DS4.7 R19.1 | length 66.5
  Bottom Layer w20: R19.1 DS4.7
NetDS4_8: DS4.8 DS6.3 | length 2950
  Top Layer w20: DS6.3 4385,2130 4395,2120 4625,2120 4640,2135 4640,3010 4465,3010 4435,3040 v1(4435,3743.44) ; DS4.8 4385,4305 4435,4255 v1(4435,3833.54)
  Bottom Layer w20: v1(4435,3743.44) v1(4435,3833.54)
NetDS4_9: DS4.9 R31.1 | length 66.5
  Bottom Layer w20: R31.1 DS4.9
NetDS4_10: DS4.10 R33.1 | length 66.5
  Bottom Layer w20: R33.1 DS4.10
NetDS5_1: DS5.1 R46.1 | length 55
  Bottom Layer w20: DS5.1 R46.1
NetDS5_2: DS5.2 R44.1 | length 55
  Bottom Layer w20: DS5.2 R44.1
NetDS5_4: DS5.4 R41.1 | length 55
  Bottom Layer w20: DS5.4 R41.1
NetDS5_6: DS5.6 R39.1 | length 68.1
  Bottom Layer w20: R39.1 DS5.6
NetDS5_7: DS5.7 R37.1 | length 68.5
  Bottom Layer w20: R37.1 3966,2739.46 DS5.7
NetDS5_8: DS5.8 DS7.3 DS7.8 | length 4141.3
  Top Layer w20: DS7.3 1299.46,2150 1125,2150 1100,2175 1100,2837.88 1118.19,2856.06 1306.47,2856.06 1321.47,2841.06 ; DS7.8 1321.47,2841.06 ; v1(1510,2920) 1345,2920 1321.47,2896.47 1321.47,2841.06 ; v1(1655,2920) v1(1925,2920) ; v1(2276.73,2960) v1(2845,2960) ; v1(3400,2960) 3505,2855 3505,2780 3520,2765 3565,2765 3585,2785 3585,2835 3640,2890 3846.34,2890 3866,2870.34 DS5.8
  Bottom Layer w20: v1(1510,2920) v1(1655,2920) ; v1(1925,2920) 2237.87,2920 2276.73,2958.86 v1(2276.73,2960) ; v1(2845,2960) v1(3400,2960)
NetDS5_9: DS5.9 R48.1 | length 68.5
  Bottom Layer w20: R48.1 3766,2739.46 DS5.9
NetDS5_10: DS5.10 R51.1 | length 68.1
  Bottom Layer w20: R51.1 DS5.10
NetDS6_1: DS6.1 R47.1 | length 55
  Bottom Layer w20: DS6.1 R47.1
NetDS6_2: DS6.2 R45.1 | length 55
  Bottom Layer w20: DS6.2 R45.1
NetDS6_4: DS6.4 R42.1 | length 55
  Bottom Layer w20: DS6.4 R42.1
NetDS6_6: DS6.6 R40.1 | length 68.1
  Bottom Layer w20: R40.1 DS6.6
NetDS6_7: DS6.7 R38.1 | length 68.1
  Bottom Layer w20: R38.1 DS6.7
NetDS6_8: DS6.8 DS8.3 DS8.8 | length 3918.7
  Top Layer w20: DS8.3 1823.46,2150 1649.2,2150 1625,2174.2 1625.53,2174.72 1625.53,2839.4 1651.13,2865 1821.54,2865 DS8.8 1880,2851.06 1898.94,2870 v1(1900,2870) ; v1@2520,2851.06 v1(2880,2851.06) ; v1(4050,2856.06) v1(4165,2856.06) ; v1(4265,2902.54) 4355,2902.54 4385,2872.54 DS6.8
  Bottom Layer w20: v1(1900,2870) 2500,2870 v1(2520,2850) ; v1(2880,2851.06) 2896.81,2867.87 4038.19,2867.87 v1(4050,2856.06) ; v1(4165,2856.06) 4218.9,2856.06 4265.19,2902.35 v1(4265,2902.54)
NetDS6_9: DS6.9 R49.1 | length 68.1
  Bottom Layer w20: R49.1 DS6.9
NetDS6_10: DS6.10 R52.1 | length 68.1
  Bottom Layer w20: R52.1 DS6.10
NetDS7_1: DS7.1 R63.1 | length 55
  Bottom Layer w20: DS7.1 R63.1
NetDS7_2: DS7.2 R61.1 | length 55
  Bottom Layer w20: DS7.2 R61.1
NetDS7_4: DS7.4 R59.1 | length 55
  Bottom Layer w20: DS7.4 R59.1
NetDS7_6: DS7.6 R57.1 | length 68.1
  Bottom Layer w20: R57.1 DS7.6
NetDS7_7: DS7.7 R55.1 | length 68.1
  Bottom Layer w20: R55.1 DS7.7
NetDS7_9: DS7.9 R65.1 | length 68.1
  Bottom Layer w20: R65.1 DS7.9
NetDS7_10: DS7.10 R67.1 | length 68.1
  Bottom Layer w20: R67.1 DS7.10
NetDS8_1: DS8.1 R64.1 | length 55
  Bottom Layer w20: DS8.1 R64.1
NetDS8_2: DS8.2 R62.1 | length 55
  Bottom Layer w20: DS8.2 R62.1
NetDS8_4: DS8.4 R60.1 | length 55
  Bottom Layer w20: DS8.4 R60.1
NetDS8_6: DS8.6 R58.1 | length 68.1
  Bottom Layer w20: R58.1 DS8.6
NetDS8_7: DS8.7 R56.1 | length 68.1
  Bottom Layer w20: R56.1 DS8.7
NetDS8_9: DS8.9 R66.1 | length 68.1
  Bottom Layer w20: R66.1 DS8.9
NetDS8_10: DS8.10 R68.1 | length 68.1
  Bottom Layer w20: R68.1 DS8.10
NetIC1_9: IC1.9 R9.2 | length 310.6
  Bottom Layer w10: R9.2 1135,4079.46 1135,4310 1160,4335 IC1.9
NetIC1_10: IC1.10 R7.2 | length 449.7
  Top Layer w10: v1(1160,4255) 1135,4230 1135,4080 1165,4050 v1(1195,4050)
  Bottom Layer w10: v1(1160,4255) 1195,4255 1225,4285 IC1.10 ; v1(1195,4050) 1247.53,4050 R7.2
NetIC1_11: IC1.11 R5.2 | length 604.3
  Bottom Layer w10: IC1.11 1275,4270 1305,4240 1530,4240 1550.83,4219.17 1550.83,4080.83 1528.46,4058.46 R5.2
NetIC1_12: IC1.12 R3.2 | length 348.4
  Bottom Layer w10: IC1.12 1325,4415 1350,4440 1545,4440 1556,4429 R3.2
NetIC1_13: IC1.13 R1.2 | length 137
  Bottom Layer w10: IC1.13 1375,4380 1401.54,4406.54 R1.2
NetIC1_14: IC1.14 R14.2 | length 466.8
  Top Layer w10: v1(1292.72,4437.28) 1412.72,4437.28 1425,4425 v1(1425,4290)
  Bottom Layer w10: R14.2 1201.32,4406.54 1232.07,4437.28 v1(1292.72,4437.28) ; v1(1425,4290) IC1.14
NetIC1_15: IC1.15 R12.2 | length 397.4
  Top Layer w10: v1(1295,4406.54) 1313.46,4406.54 1325,4395 1325,4285 1345,4265 v1(1450,4265)
  Bottom Layer w10: R12.2 v1(1295,4406.54) ; v1(1450,4265) 1475,4290 IC1.15
NetIC2_9: IC2.9 R10.2 | length 293.1
  Bottom Layer w10: R10.2 1674.17,4058.46 1674.17,4309.17 IC2.9
NetIC2_10: IC2.10 R8.2 | length 416.4
  Top Layer w10: v1(1705,4265) 1675,4235 1675,4076.93 1693.46,4058.46 v1(1723.46,4058.46)
  Bottom Layer w10: v1(1705,4265) 1730,4265 1750,4285 IC2.10 ; v1(1723.46,4058.46) R8.2
NetIC2_11: IC2.11 R6.2 | length 604.1
  Bottom Layer w10: IC2.11 1800,4280 1837.87,4242.13 2052.87,4242.13 2085,4210 2085,4095 2048.46,4058.46 R6.2
NetIC2_12: IC2.12 R4.2 | length 325.5
  Bottom Layer w10: IC2.12 1850,4390 1892.28,4432.28 2066.72,4432.28 2080,4419 R4.2
NetIC2_13: IC2.13 R2.2 | length 135.9
  Bottom Layer w10: IC2.13 1900,4383.46 1918.07,4401.54 R2.2
NetIC2_14: IC2.14 R15.2 | length 454
  Top Layer w10: v1(1825,4432.28) 1922.72,4432.28 1950,4405 v1(1950,4290)
  Bottom Layer w10: R15.2 1685.43,4401.54 1716.18,4432.28 v1(1825,4432.28) ; v1(1950,4290) IC2.14
NetIC2_15: IC2.15 R13.2 | length 382.6
  Top Layer w10: v1(1825,4401.54) 1850,4376.54 1850,4290 1875,4265 v1(1975,4265)
  Bottom Layer w10: R13.2 v1(1825,4401.54) ; v1(1975,4265) 2000,4290 IC2.15
NetIC3_9: IC3.9 R28.2 | length 303.5
  Bottom Layer w10: R28.2 3645,4084.46 3645,4315 3665,4335 IC3.9
NetIC3_10: IC3.10 R25.2 | length 438
  Top Layer w10: v1(3670,4270) 3645,4245 3645,4086 3666,4065 v1(3705,4065)
  Bottom Layer w10: v1(3670,4270) 3710,4270 3730,4290 IC3.10 ; v1(3705,4065) 3764.46,4065 R25.2
NetIC3_11: IC3.11 R23.2 | length 591.4
  Bottom Layer w10: IC3.11 3780,4280 3820,4240 4035,4240 4060,4215 4060,4090.83 4032.63,4063.46 R23.2
NetIC3_12: IC3.12 R21.2 | length 321.1
  Bottom Layer w10: IC3.12 3830,4372.35 3889.93,4432.28 4052.72,4432.28 4066,4419 R21.2
NetIC3_13: IC3.13 R18.2 | length 136
  Bottom Layer w10: IC3.13 3880,4375 3906.54,4401.54 R18.2
NetIC3_14: IC3.14 R32.2 | length 438
  Top Layer w10: v1(3837.72,4432.28) 3902.72,4432.28 3930,4405 v1(3930,4295)
  Bottom Layer w10: R32.2 3696.75,4432.28 v1(3837.72,4432.28) ; v1(3930,4295) IC3.14
NetIC3_15: IC3.15 R30.2 | length 396.1
  Top Layer w10: v1(3830,4405) 3865,4405 3880,4390 3880,4275 3890,4265 v1(3955,4265)
  Bottom Layer w10: R30.2 3769.46,4405 v1(3830,4405) ; v1(3955,4265) 3980,4290 IC3.15
NetIC4_9: IC4.9 R29.2 | length 288.1
  Bottom Layer w10: R29.2 4179.17,4063.46 4179.17,4309.17 IC4.9
NetIC4_10: IC4.10 R26.2 | length 421.3
  Top Layer w10: v1(4205,4270) 4180,4245 4180,4075 4195,4060 v1(4225,4060)
  Bottom Layer w10: v1(4205,4270) 4235,4270 4255,4290 IC4.10 ; v1(4225,4060) 4281.54,4060 R26.2
NetIC4_11: IC4.11 R24.2 | length 603.3
  Bottom Layer w10: IC4.11 4305,4270 4332.87,4242.13 4557.87,4242.13 4585,4215 4585,4090.83 4557.63,4063.46 R24.2
NetIC4_12: IC4.12 R22.2 | length 329.1
  Bottom Layer w10: IC4.12 4355,4395 4392.28,4432.28 4405.37,4432.28 4405.53,4432.13 4424.47,4432.13 4424.63,4432.28 4572.72,4432.28 4585,4420 R22.2
NetIC4_13: IC4.13 R19.2 | length 131
  Bottom Layer w10: IC4.13 4405,4375 4431.54,4401.54 R19.2
NetIC4_14: IC4.14 R33.2 | length 493.4
  Top Layer w10: v1(4415,4455) 4440,4455 4455,4440 v1(4455,4290)
  Bottom Layer w10: R33.2 4221.18,4437.72 4308.93,4437.72 4326.21,4455 v1(4415,4455) ; v1(4455,4290) IC4.14
NetIC4_15: IC4.15 R31.2 | length 399.3
  Top Layer w10: v1(4325,4401.54) 4348.46,4401.54 4355,4395 4355,4280 v1(4370,4265)
  Bottom Layer w10: R31.2 v1(4325,4401.54) ; v1(4370,4265) 4480,4265 4505,4290 IC4.15
NetIC5_9: IC5.9 R46.2 | length 303.5
  Bottom Layer w10: R46.2 3645,2349.46 3645,2580 3665,2600 IC5.9
NetIC5_10: IC5.10 R44.2 | length 438.5
  Top Layer w10: v1(3670,2525) 3645,2500 3645,2350 3670,2325 v1(3705,2325)
  Bottom Layer w10: v1(3670,2525) 3705,2525 3730,2550 IC5.10 ; v1(3705,2325) 3762.54,2325 R44.2
NetIC5_11: IC5.11 R41.2 | length 589.3
  Bottom Layer w10: IC5.11 3780,2540 3825,2495 4035,2495 4060,2470 4060,2354.46 4048.41,2342.87 3992.24,2342.87 3977.83,2328.46 R41.2
NetIC5_12: IC5.12 R39.2 | length 338.7
  Bottom Layer w10: IC5.12 3830,2660 3875,2705 4050,2705 4066,2689 R39.2
NetIC5_13: IC5.13 R37.2 | length 141
  Bottom Layer w10: IC5.13 3880,2645 3906.54,2671.54 R37.2
NetIC5_14: IC5.14 R51.2 | length 461.1
  Top Layer w10: v1(3795,2705) 3910,2705 3930,2685 v1(3930,2555)
  Bottom Layer w10: R51.2 3699.46,2705 v1(3795,2705) ; v1(3930,2555) IC5.14
NetIC5_15: IC5.15 R48.2 | length 400.5
  Top Layer w10: v1(3795,2671.54) 3813.46,2671.54 3830,2655 3830,2545 3850,2525 v1(3955,2525)
  Bottom Layer w10: R48.2 v1(3795,2671.54) ; v1(3955,2525) 3980,2550 IC5.15
NetIC6_9: IC6.9 R47.2 | length 304
  Bottom Layer w10: R47.2 4170,2343.46 4170,2585 4185,2600 IC6.9
NetIC6_10: IC6.10 R45.2 | length 492.1
  Top Layer w10: v1(4195,2530) 4170,2505 4170,2315 4195,2290 v1(4245,2290)
  Bottom Layer w10: v1(4195,2530) 4235,2530 4255,2550 IC6.10 ; v1(4245,2290) 4258.79,2290 4285,2316.21 R45.2
NetIC6_11: IC6.11 R42.2 | length 595.3
  Bottom Layer w10: IC6.11 4305,2540 4340,2505 4557.35,2505 4580.83,2481.52 4580.83,2351.66 4557.63,2328.46 R42.2
NetIC6_12: IC6.12 R40.2 | length 333.3
  Bottom Layer w10: IC6.12 4355,2660 4400,2705 4570,2705 4585,2690 R40.2
NetIC6_13: IC6.13 R38.2 | length 133.1
  Bottom Layer w10: IC6.13 4405,2640 4436.54,2671.54 R38.2
NetIC6_14: IC6.14 R52.2 | length 464.7
  Top Layer w10: v1(4325,2705) 4430,2705 4455,2680 v1(4455,2555)
  Bottom Layer w10: R52.2 4185,2672.35 4201.85,2672.35 4234.5,2705 v1(4325,2705) ; v1(4455,2555) IC6.14
NetIC6_15: IC6.15 R49.2 | length 386.7
  Top Layer w10: v1(4325,2671.54) 4338.46,2671.54 4355,2655 4355,2560 4385,2530 v1(4475,2530)
  Bottom Layer w10: R49.2 v1(4325,2671.54) ; v1(4475,2530) 4505,2560 IC6.15
NetIC7_9: IC7.9 R63.2 | length 308.5
  Bottom Layer w10: R63.2 1135,2349.46 1135,2580 1155,2600 IC7.9
NetIC7_10: IC7.10 R61.2 | length 440.6
  Top Layer w10: v1(1165,2525) 1135,2495 1135,2350 1155,2330 v1(1195,2330)
  Bottom Layer w10: v1(1165,2525) 1205,2525 1225,2545 IC7.10 ; v1(1195,2330) 1196.54,2328.46 R61.2
NetIC7_11: IC7.11 R59.2 | length 593.4
  Bottom Layer w10: IC7.11 1275,2540 1320,2495 1529,2495 1555,2469 1555,2355 1528.46,2328.46 R59.2
NetIC7_12: IC7.12 R57.2 | length 333.7
  Bottom Layer w10: IC7.12 1325,2660 1370,2705 1540,2705 1556,2689 R57.2
NetIC7_13: IC7.13 R55.2 | length 137.9
  Bottom Layer w10: IC7.13 1375,2646.54 1400,2671.54 R55.2
NetIC7_14: IC7.14 R67.2 | length 457.4
  Top Layer w10: v1(1300,2705) 1390,2705 1425,2670 v1(1425,2555)
  Bottom Layer w10: R67.2 1189.46,2705 v1(1300,2705) ; v1(1425,2555) IC7.14
NetIC7_15: IC7.15 R65.2 | length 408.6
  Top Layer w10: v1(1300,2671.54) 1313.46,2671.54 1325,2660 1325,2550 1355,2520 v1(1445,2520)
  Bottom Layer w10: R65.2 v1(1300,2671.54) ; v1(1445,2520) 1475,2550 IC7.15
NetIC8_9: IC8.9 R64.2 | length 308.1
  Bottom Layer w10: R64.2 1660,2348.46 1660,2580 1680,2600 IC8.9
NetIC8_10: IC8.10 R62.2 | length 442.6
  Top Layer w10: v1(1685,2530) 1660,2505 1660,2350 1681.54,2328.46 v1(1726.93,2328.46)
  Bottom Layer w10: v1(1685,2530) 1730,2530 1750,2550 IC8.10 ; v1(1726.93,2328.46) R62.2
NetIC8_11: IC8.11 R60.2 | length 602.1
  Bottom Layer w10: IC8.11 1800,2545 1835,2510 2050,2510 2085,2475 2085,2360 2053.46,2328.46 R60.2
NetIC8_12: IC8.12 R58.2 | length 333.3
  Bottom Layer w10: IC8.12 1850,2660 1895,2705 2065,2705 2080,2690 R58.2
NetIC8_13: IC8.13 R56.2 | length 133.1
  Bottom Layer w10: IC8.13 1900,2640 1931.54,2671.54 R56.2
NetIC8_14: IC8.14 R68.2 | length 460.1
  Top Layer w10: v1(1810,2705) 1935,2705 1950,2690 v1(1950,2560)
  Bottom Layer w10: R68.2 1713.46,2705 v1(1810,2705) ; v1(1950,2560) IC8.14
NetIC8_15: IC8.15 R66.2 | length 382.6
  Top Layer w10: v1(1810,2671.54) 1833.46,2671.54 1850,2655 1850,2560 1875,2535 v1(1975,2535)
  Bottom Layer w10: R66.2 v1(1810,2671.54) ; v1(1975,2535) 2000,2560 IC8.15
NetLED1_1: LED1.1 R11.1 | length 111.9
  Bottom Layer w20: R11.1 2271.54,4466.54 LED1.1
NetLED2_1: LED2.1 R16.1 | length 113.9
  Bottom Layer w20: R16.1 2266.54,4191.54 LED2.1
NetLED3_1: LED3.1 R17.1 | length 116
  Bottom Layer w20: R17.1 2261.54,3916.54 LED3.1
NetLED4_1: LED4.1 R20.1 | length 119.2
  Bottom Layer w20: LED4.1 3479.16,4466.54 R20.1
NetLED5_1: LED5.1 R27.1 | length 121.2
  Bottom Layer w20: LED5.1 3484.16,4191.54 R27.1
NetLED6_1: LED6.1 R34.1 | length 123.3
  Bottom Layer w20: LED6.1 3489.16,3916.54 R34.1
NetLED7_1: LED7.1 R35.1 | length 119.2
  Bottom Layer w20: LED7.1 3479.16,2738.07 R35.1
NetLED8_1: LED8.1 R36.1 | length 118.9
  Bottom Layer w20: LED8.1 3478.46,2468.77 R36.1
NetLED9_1: LED9.1 R43.1 | length 119.8
  Bottom Layer w20: LED9.1 3480.7,2196.54 R43.1
NetLED10_1: LED10.1 R50.1 | length 111.9
  Bottom Layer w20: R50.1 2271.54,2738.07 LED10.1
NetLED11_1: LED11.1 R53.1 | length 111.6
  Bottom Layer w20: R53.1 2272.23,2468.77 LED11.1
NetLED12_1: LED12.1 R54.1 | length 112.5
  Bottom Layer w20: R54.1 2270,2196.54 LED12.1
NetLED13_1: LED13.1 R69.1 | length 280.9
  Top Layer w20: R69.1 5742.74,1550 LED13.1
RST: U1.13 U1.33 | length 600
  Bottom Layer w10: U1.13 U1.33
VCC: DS1.3 DS1.8 DS2.3 DS2.8 DS3.3 DS4.3 IC1.3 IC1.4 IC1.5 IC1.16 IC2.3 IC2.4 IC2.5 IC2.16 IC3.3 IC3.4 IC3.5 IC3.16 IC4.3 IC4.4 IC4.5 IC4.16 IC5.3 IC5.4 IC5.5 IC5.16 IC6.3 IC6.4 IC6.5 IC6.16 IC7.3 IC7.4 IC7.5 IC7.16 IC8.3 IC8.4 IC8.5 IC8.16
pads on no net: DS1.0 DS1.5 DS2.0 DS2.5 DS3.0 DS3.5 DS4.0 DS4.5 DS5.0 DS5.5 DS6.0 DS6.5 DS7.0 DS7.5 DS8.0 DS8.5 U1.2 U1.3 U1.40

## Polygon pours and split planes (outlines as drawn)
no net on Top Overlay (solid, remove dead copper): 2625,4230

## Silkscreen, mask and mechanical layers (free items; w line width, h text height)
Top Overlay:
  drawing of 32 lines, arcs and shapes, not listed